# EAGLE board tashtenhat (EAGLE 6.5.0)
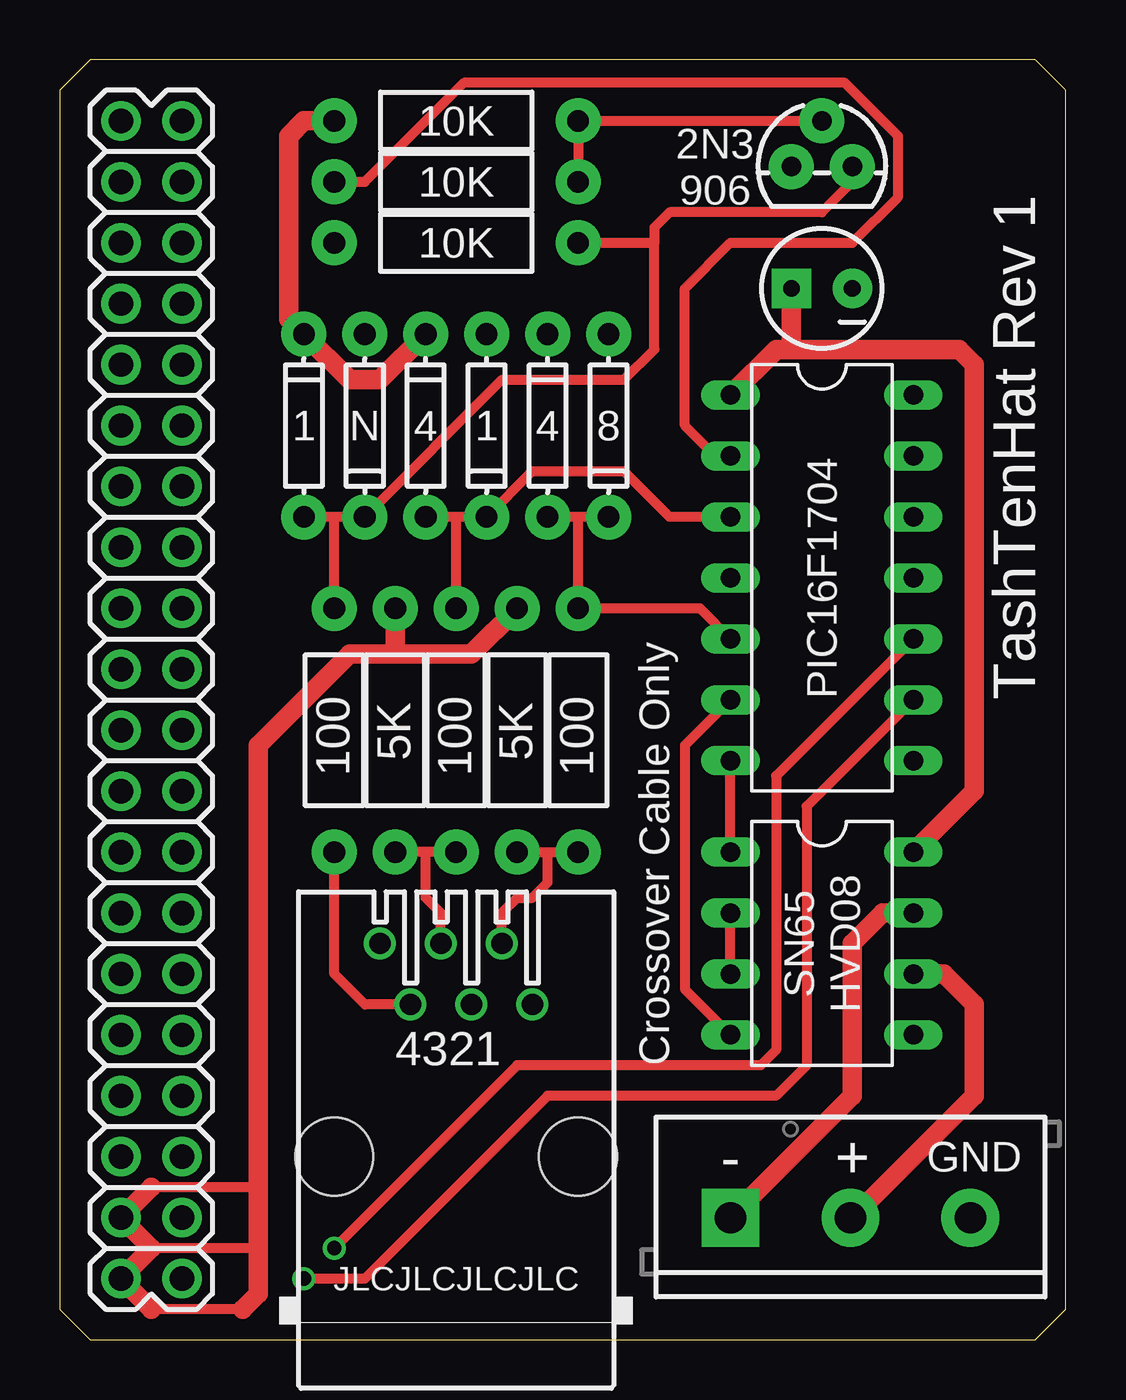
[diagram p0: board, top side]
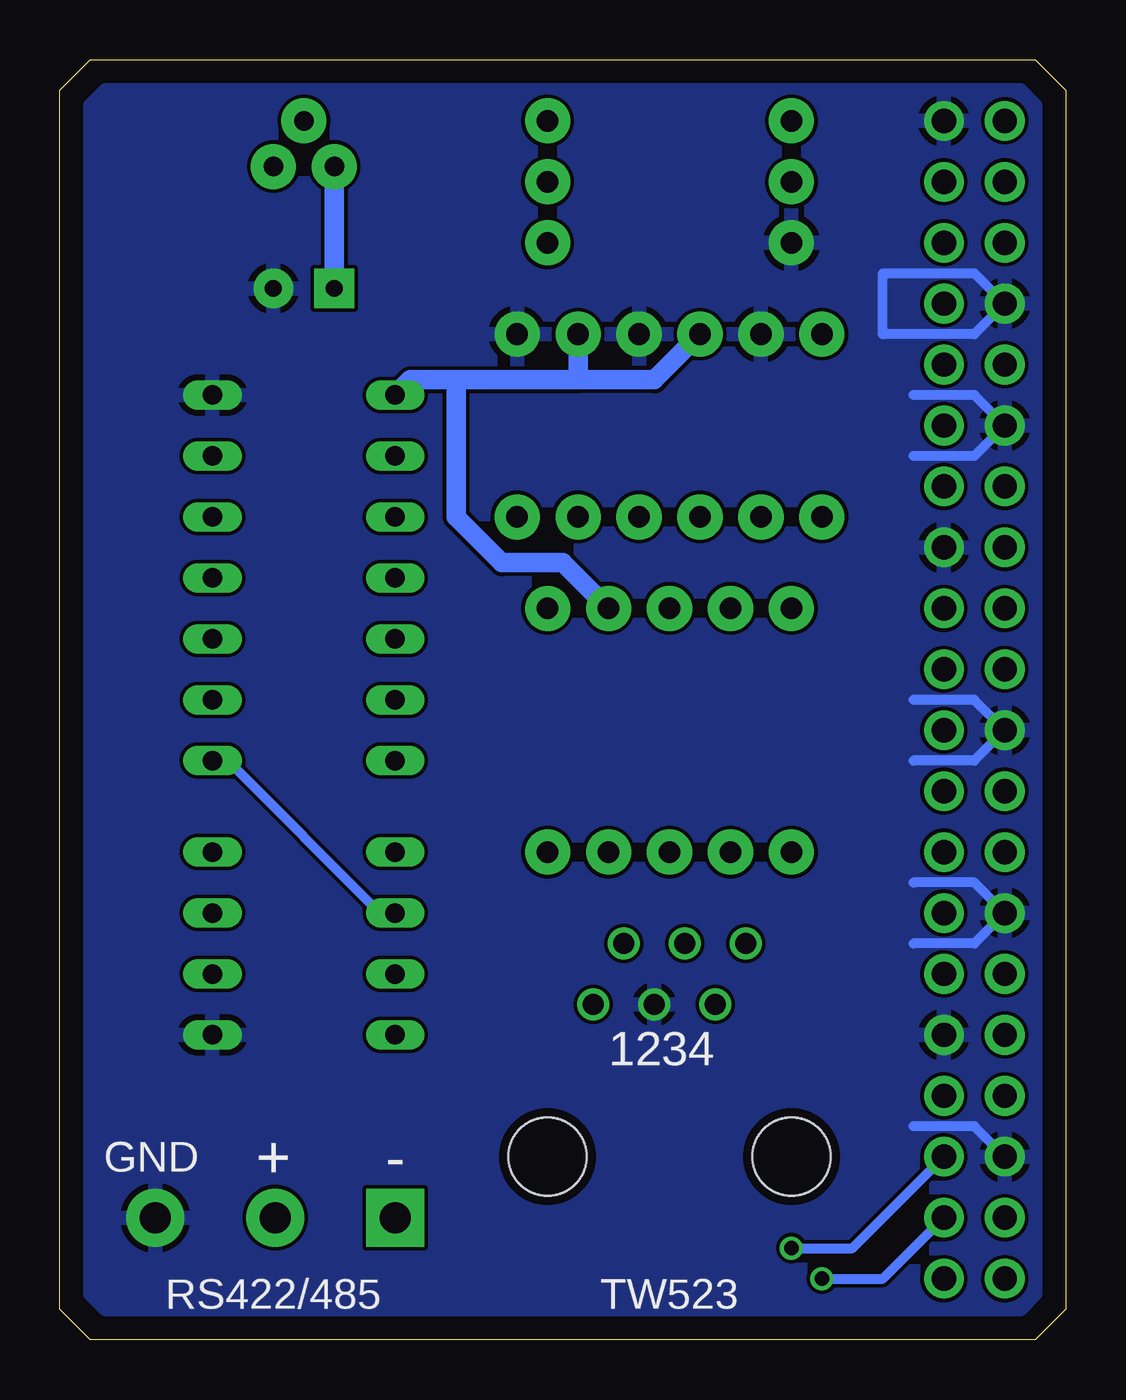
[diagram p1: board, bottom side, seen from below]

Size 41.91 x 53.34 mm. Coordinates in mm from the lower left corner, seen from the top.
Outline: 0,1.27 1.27,0 40.64,0 41.91,1.27 41.91,52.07 40.64,53.34 1.27,53.34 0,52.07 0,1.27
Copper layers (1*16): Top 0.0356mm / dielectric 1.5011mm / Bottom 0.0356mm
Design rules "LaenPCBOrder": minimum track width 6mil, minimum drill 13mil, track to track 6mil, track to pad 6mil, pad to pad 6mil, via to via 6mil, smd to smd 6mil, copper to edge 15mil, drill to drill 6mil, minimum pad ring 7mil, minimum via ring 7mil, stop-mask expansion 3mil, vias tented up to drill 0mil, thermal gap 10mil

## Footprints (pad centres in the part's own frame; a part is rotated, then mirrored left to right if it is on the bottom)
520250-3 = drill 0.889: 1 -3.175,8.89; 2 -1.905,6.35; 3 -0.635,8.89; 4 0.635,6.35; 5 1.905,8.89; 6 3.175,6.35 | hole 3.251: -5.08,0; 5.08,0
2X20 = drill 1.016 pad 1.651: 1 -24.13,-1.27; 2 -24.13,1.27; 3 -21.59,-1.27; 4 -21.59,1.27; 5 -19.05,-1.27; 6 -19.05,1.27; 7 -16.51,-1.27; 8 -16.51,1.27; 9 -13.97,-1.27; 10 -13.97,1.27; 11 -11.43,-1.27; 12 -11.43,1.27; 13 -8.89,-1.27; 14 -8.89,1.27; 15 -6.35,-1.27; 16 -6.35,1.27; 17 -3.81,-1.27; 18 -3.81,1.27; 19 -1.27,-1.27; 20 -1.27,1.27; 21 1.27,-1.27; 22 1.27,1.27; 23 3.81,-1.27; 24 3.81,1.27; 25 6.35,-1.27; 26 6.35,1.27; 27 8.89,-1.27; 28 8.89,1.27; 29 11.43,-1.27; 30 11.43,1.27; 31 13.97,-1.27; 32 13.97,1.27; 33 16.51,-1.27; 34 16.51,1.27; 35 19.05,-1.27; 36 19.05,1.27; 37 21.59,-1.27; 38 21.59,1.27; 39 24.13,-1.27; 40 24.13,1.27
DIL14 = drill 0.813 long: 1 -7.62,-3.81; 2 -5.08,-3.81; 3 -2.54,-3.81; 4 0,-3.81; 5 2.54,-3.81; 6 5.08,-3.81; 7 7.62,-3.81; 8 7.62,3.81; 9 5.08,3.81; 10 2.54,3.81; 11 0,3.81; 12 -2.54,3.81; 13 -5.08,3.81; 14 -7.62,3.81
DIODE-1N4148 = drill 0.9 pad 1.88: A -3.81,0; C 3.81,0
AXIAL-0.4 = drill 0.9 pad 1.88: P$1 -5.08,0; P$2 5.08,0
TO-92 = drill 0.813 pad 1.88: 1 -1.27,0; 2 0,1.905; 3 1.27,0
CPOL-RADIAL-10UF-25V = drill 0.7 pad 1.651 square: 1 1.27,0 | drill 0.7 pad 1.651: 2 -1.27,0
DIL08 = drill 0.813 long: 1 -3.81,-3.81; 2 -1.27,-3.81; 3 1.27,-3.81; 4 3.81,-3.81; 5 3.81,3.81; 6 1.27,3.81; 7 -1.27,3.81; 8 -3.81,3.81
SCREWTERMINAL-5MM-3 = drill 1.3 pad 2.413 square: 1 0,0 | drill 1.3 pad 2.413: 2 5,0; 3 10,0

## Placement (x,y rotation side)
E$1  [520250-3]  16.51,7.62 0 top
E$2  [2X20]  3.81,26.67 90 top
E$3  [DIL14]  31.75,31.75 270 top
E$4  [DIODE-1N4148]  10.16,38.1 90 top
E$5  [DIODE-1N4148]  12.7,38.1 270 top
E$6  [DIODE-1N4148]  15.24,38.1 90 top
E$7  [DIODE-1N4148]  17.78,38.1 270 top
E$8  [DIODE-1N4148]  20.32,38.1 90 top
E$9  [DIODE-1N4148]  22.86,38.1 270 top
E$10  [AXIAL-0.4]  13.97,25.4 90 top
E$11  [AXIAL-0.4]  11.43,25.4 90 top
E$12  [AXIAL-0.4]  16.51,25.4 90 top
E$13  [AXIAL-0.4]  19.05,25.4 90 top
E$14  [AXIAL-0.4]  21.59,25.4 90 top
E$15  [AXIAL-0.4]  16.51,50.8 0 top
E$16  [AXIAL-0.4]  16.51,48.26 0 top
E$17  [AXIAL-0.4]  16.51,45.72 0 top
E$18  [TO-92]  31.75,48.9 0 top
E$19  [CPOL-RADIAL-10UF-25V]  31.75,43.81 180 top
E$20  [DIL08]  31.75,16.51 270 top
E$21  [SCREWTERMINAL-5MM-3]  27.94,5.08 0 top

## Library data of the parts
E$1 = con-amp
E$2 E$21 = SparkFun-Connectors
E$3 E$20 = ic-package
E$4-E$9 E$18 = SparkFun-DiscreteSemi
E$10-E$17 = SparkFun-Resistors
E$19 = SparkFun-Capacitors

## Nets
S$1: E$1.5 E$13.P$1 E$14.P$1
S$2: E$1.3 E$10.P$1 E$12.P$1
S$3: E$1.2 E$11.P$1
S$4: E$4.A E$5.C E$11.P$2 E$17.P$2 E$18.3
S$5: E$3.3 E$6.A E$7.C E$12.P$2
S$6: E$3.5 E$8.A E$9.C E$14.P$2
S$7: E$2.2 E$2.4 E$3.1 E$4.C E$6.C E$8.C E$10.P$2 E$13.P$2 E$15.P$1 E$18.1 E$19.1 E$20.8
S$8: E$1.4 E$2.6 E$2.9 E$2.14 E$2.20 E$2.25 E$2.30 E$2.34 E$2.39 E$3.14 E$5.A E$7.A E$9.A E$17.P$1 E$19.2 E$20.5 E$21.3
S$9: E$15.P$2 E$16.P$2 E$18.2
S$10: E$3.2 E$16.P$1
S$11: E$2.3 E$3.9
S$12: E$2.5 E$3.10
S$13: E$3.7 E$20.1
S$14: E$3.6 E$20.4
S$15: E$3.8 E$20.2 E$20.3
S$16: E$20.7 E$21.1
S$17: E$20.6 E$21.2

## Tracks (layer width: path | path; a pad name or v marks a point on that pad's centre or on a via)
S$1
  Top 0.406: E$13.P$1 20.32,20.32 | 20.32,20.32 E$14.P$1 | E$1.5 18.41,17.78 19.05,18.41 19.68,18.41 20.32,19.05 20.32,20.32
S$2
  Top 0.406: E$12.P$1 15.24,20.32 | 15.24,20.32 E$10.P$1 | E$1.3 15.88,17.78 15.24,18.41 15.24,20.32
S$3
  Top 0.406: E$1.2 12.7,13.97 11.43,15.24 E$11.P$1
S$4
  Top 0.406: 11.43,34.29 E$5.C 18.41,40.01 23.5,40.01 24.77,41.27 24.77,45.72 | 11.43,34.29 E$4.A | E$11.P$2 11.43,34.29 | E$17.P$2 24.77,45.72 | E$18.3 33.02,48.26 31.75,46.99 25.4,46.99 24.77,46.35 24.77,45.72
S$5
  Top 0.406: 16.51,34.29 E$7.C 19.68,36.2 23.5,36.2 25.4,34.29 E$3.3 | 16.51,34.29 E$6.A | E$12.P$2 16.51,34.29
S$6
  Top 0.406: E$9.C 21.59,34.29 | 21.59,34.29 E$8.A | 21.59,34.29 E$14.P$2 26.67,30.48 E$3.5
S$7
  Top 0.406: 8.26,6.35 3.81,6.35 | 8.26,3.81 3.81,3.81 | 7.62,1.27 3.81,1.27
  Top 0.813: E$15.P$1 10.16,50.8 9.53,50.16 9.53,42.55 E$4.C 12.06,40.01 13.34,40.01 E$6.C | E$13.P$2 17.14,28.57 13.97,28.57 | 3.81,6.35 E$2.4 3.81,3.81 E$2.2 3.81,1.27 | 7.62,1.27 8.26,1.91 8.26,3.81 8.26,6.35 8.26,24.77 12.06,28.57 13.97,28.57 | E$10.P$2 13.97,28.57 | E$20.8 38.1,22.86 38.1,40.64 37.47,41.27 30.48,41.27 | 30.48,41.27 29.84,41.27 E$3.1 | E$19.1 30.48,41.27
  Bottom 0.813: E$18.1 E$19.1 | E$8.C 20.32,40.01 | E$13.P$2 20.95,32.38 23.5,32.38 25.4,34.29 25.4,40.01 | E$6.C 17.14,40.01 20.32,40.01 | 25.4,40.01 20.32,40.01 | E$3.1 27.3,40.01 25.4,40.01
S$8
  Bottom 0.406: 6.35,36.83 3.81,36.83 E$2.30 3.81,39.37 6.35,39.37 | E$2.6 3.81,8.89 6.35,8.89 | 6.35,16.51 3.81,16.51 E$2.14 3.81,19.05 6.35,19.05 | 6.35,24.13 3.81,24.13 E$2.20 3.81,26.67 6.35,26.67 | E$2.34 3.81,41.91 7.62,41.91 7.62,44.45 3.81,44.45 E$2.34
  pour Bottom: 1.27,51.44 1.27,1.91 1.91,1.27 40.01,1.27 40.64,1.91 40.64,51.44 40.01,52.07 1.91,52.07
S$9
  Top 0.406: E$18.2 E$15.P$2 E$16.P$2
S$10
  Top 0.406: E$16.P$1 12.7,48.26 16.83,52.39 32.7,52.39 34.92,50.16 34.92,47.62 33.02,45.72 27.94,45.72 26.04,43.81 26.04,38.1 27.3,36.83 E$3.2
S$11  (via drill 0.6)
  Top 0.406: E$3.9 31.11,22.23 31.11,11.43 29.84,10.16 20.32,10.16 12.7,2.54 v10.16,2.54
  Bottom 0.406: v10.16,2.54 7.62,2.54 E$2.3
S$12  (via drill 0.6)
  Top 0.406: E$3.10 29.84,23.5 29.84,12.06 29.21,11.43 19.05,11.43 v11.43,3.81
  Bottom 0.406: v11.43,3.81 8.89,3.81 E$2.5
S$13
  Top 0.406: E$20.1 E$3.7
S$14
  Top 0.406: E$3.6 26.04,24.77 26.04,14.61 E$20.4
S$15
  Top 0.406: E$20.3 E$20.2
  Bottom 0.406: E$20.2 28.57,17.78 34.92,24.13 E$3.8
S$16
  Top 0.813: E$20.7 34.29,17.78 33.02,16.51 33.02,10.16 E$21.1
S$17
  Top 0.813: E$20.6 36.83,15.24 38.1,13.97 38.1,10.16 33.02,5.08 E$21.2

## Text on the board
tNames: 10K | 2N3 / 906 | 10K | 10K | 1 | N | 4 | 1 | 4 | 8 | PIC16F1704 | TashTenHat Rev 1 | 5K | 5K | 100 | 100 | 100 | SN65 / HVD08 | 4321 | Crossover Cable Only | - | + | GND | JLCJLCJLCJLC
bNames: 1234 | - | + | GND | TW523 | RS422/485